# Altium PCB RP2024 DB.PcbDoc
Units mil, origin at the board's own origin, x right, y up, seen from the top; angles counter-clockwise.
Board outline 6000 x 4000 mil, 4 copper layers (Top Layer, Layer 1, Layer 2, Bottom Layer), stack 23.756 mil thick; 43 components, 64 nets, 188 pads, 0 vias.
Unrouted connection lines stored in the file: 112.
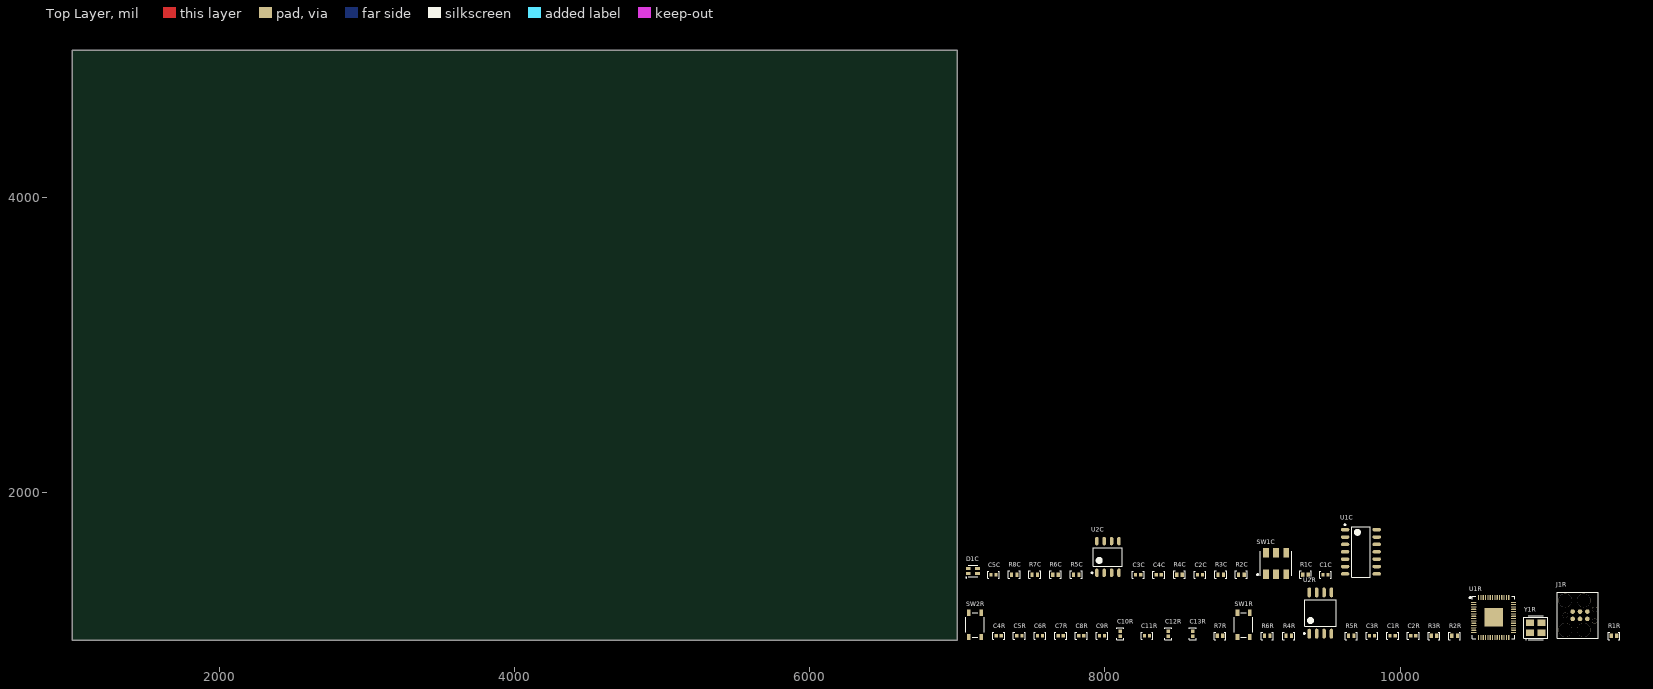
[diagram p0: Top Layer view]
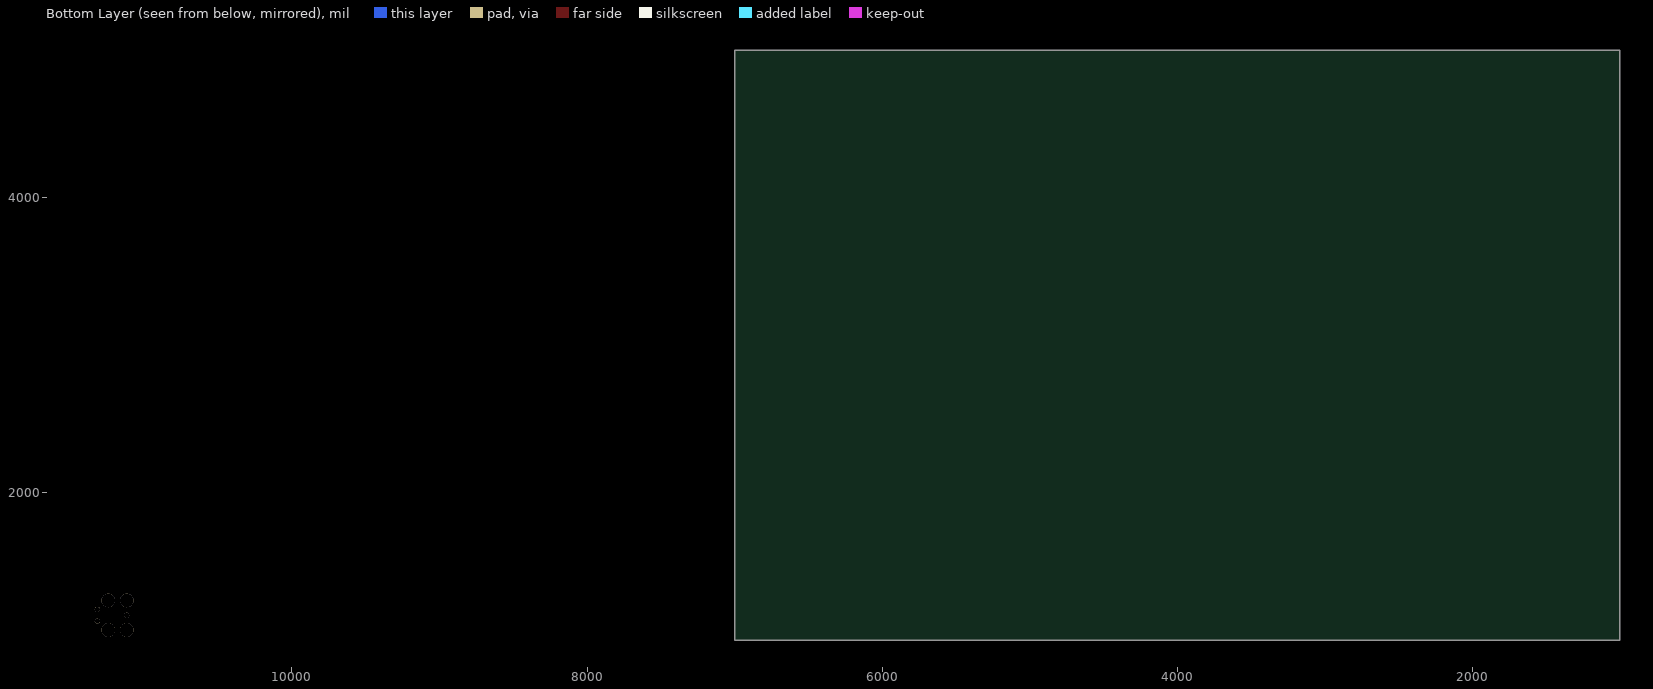
[diagram p1: Bottom Layer view, seen from below]
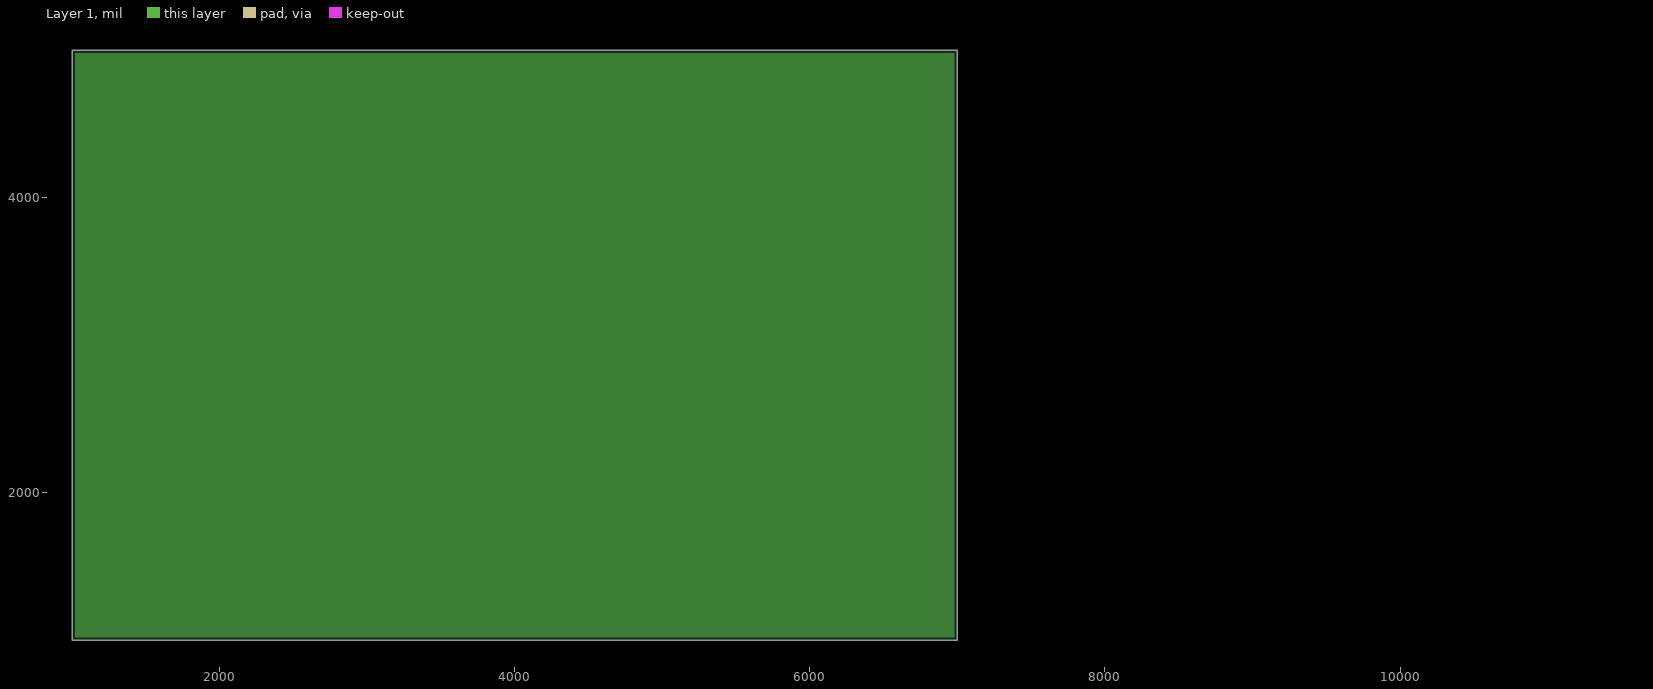
[diagram p2: Layer 1, clearances drawn from the general rule]
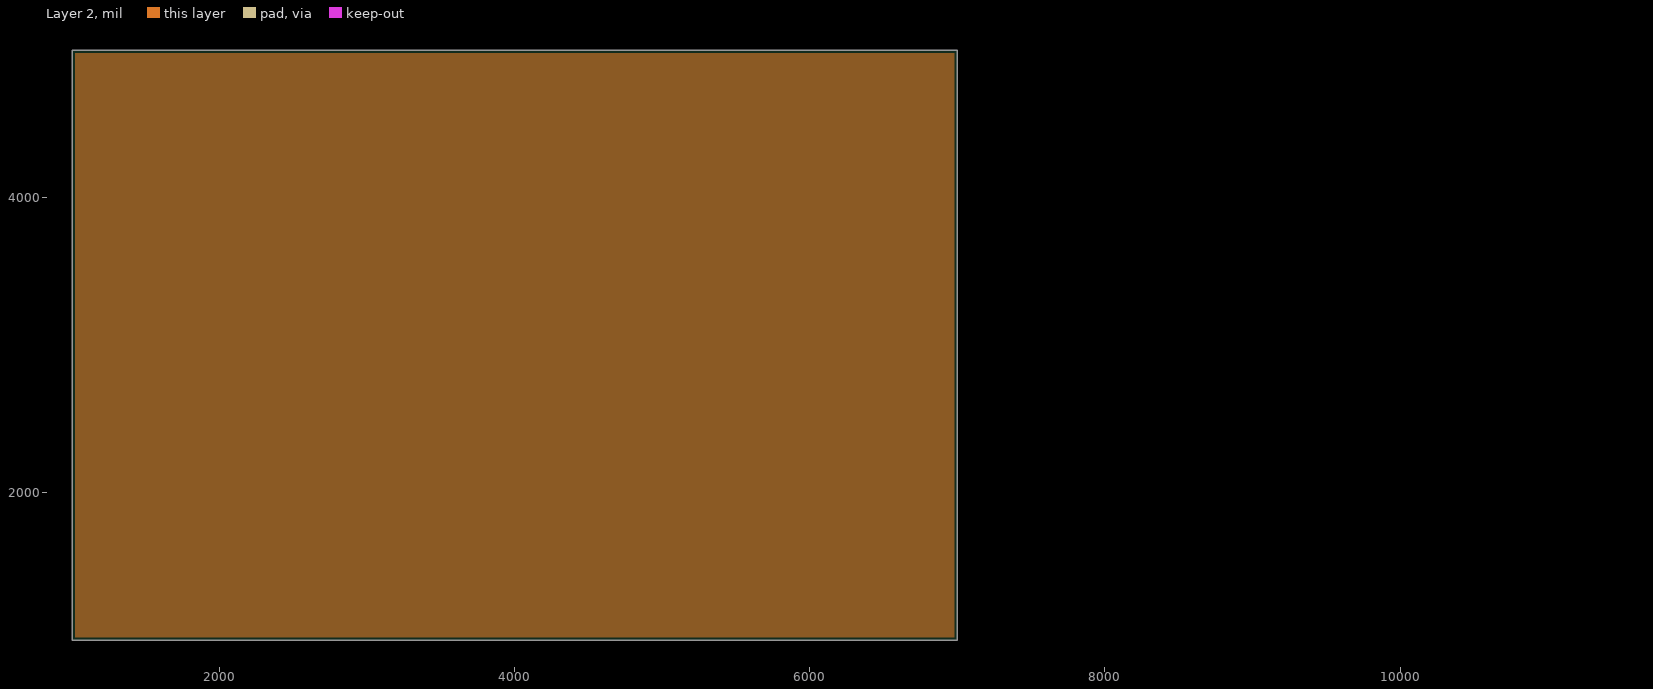
[diagram p3: Layer 2, clearances drawn from the general rule]

## Layer stack, top to bottom
Top Solder: solder mask 0.4, Solder Resist, Dk 3.5
Top Layer: signal copper 1.4
Dielectric 2: prepreg 2.8, PP-006, Dk 4.1
Layer 1: plane copper 1.378
Dielectric 1: dielectric 12.6, FR-4, Dk 4.8
Layer 2: plane copper 1.378
Dielectric 3: prepreg 2.8, PP-006, Dk 4.1
Bottom Layer: signal copper 1.4
Bottom Solder: solder mask 0.4, Solder Resist, Dk 3.5

## Board outline
1000,1000 7000,1000 7000,5000 1000,5000

## Design rules (kind name [scope] priority, off if disabled: settings)
Clearance [All] p1: gap=10 ignorepadtopadclearanceinfootprint=FALSE
DiffPairsRouting [All] p1: maxlimit=10 minlimit=10 mostfreqgap=10 toplayer_minwidth=15 toplayer_maxwidth=15 toplayer_prefwidth=15 bottomlayer_minwidth=15 bottomlayer_maxwidth=15 bottomlayer_prefwidth=15 maxuncoupledlength=500
PlaneClearance [All] p1: clearance=20
PlaneConnect [All] p1: planeconnectstyle=Relief reliefexpansion=20 reliefentries=4 reliefconductorwidth=10 reliefairgap=10
PolygonConnect [All] p1: connectstyle=Relief reliefconductorwidth=10 reliefentries=4 polygonreliefangle="90 Angle" airgapwidth=10
RoomDefinition U_RP2040_with_CAN [InComponentClass('U_RP2040_with_CAN')] p1: confinementstyle=ConfineIn formatcopy=TRUE lockcomponents=FALSE outline 7045,1410 9890,1410 9890,1860 7045,1860
RoomDefinition U_RP2040_C [InComponentClass('U_RP2040_C')] p2: confinementstyle=ConfineIn formatcopy=TRUE lockcomponents=FALSE outline 7045,995 11500,995 11500,1435 7045,1435
RoutingVias [All] p1: holewidth=28 width=50 viastyle="Through Hole" minholewidth=28 minwidth=50 maxholewidth=28 maxwidth=50
SolderMaskExpansion [All] p1: expansion=0 istentingtop=FALSE
Width [All] p1: maxlimit=10 minlimit=10 preferedwidth=10
27 further rules are at their usual default settings.

## Classes and differential pairs
differential pair class "USB 2.0": USB_RP2040
component class U_RP2040_with_CAN: C1C C2C C3C C4C C5C D1C R1C R2C R3C R4C R5C R6C R7C R8C SW1C U1C U2C
component class U_RP2040_C: C1R C2R C3R C4R C5R C6R C7R C8R C9R C10R C11R C12R C13R J1R R1R R2R R3R R4R R5R R6R R7R SW1R SW2R U1R U2R Y1R
differential pair USB_RP2040: +USB_RP2040_P -USB_RP2040_N

## Components (designator, comment, footprint, x,y, rotation, side; value= is the part's Value field where it differs from the comment)
C1C "100nF Ceramic 25V" CAPACITOR_0402 9495,1445 r0 top value=0.1uF
C1R "27pF Ceramic 50V" CAPACITOR_0402 9950,1030 r0 top value=27pF
C2C "4700pF Ceramic 25V" CAPACITOR_0402 8645,1445 r0 top value=4.7nF
C2R "27pF Ceramic 50V" CAPACITOR_0402 10090,1030 r0 top value=27pF
C3C "100nF Ceramic 25V" CAPACITOR_0402 8225,1445 r0 top value=0.1uF
C3R "100nF Ceramic 6.3V" CAPACITOR_0402 9810,1030 r0 top value=0.1uF
C4C "100nF Ceramic 25V" CAPACITOR_0402 8365,1445 r0 top value=0.1uF
C4R "1uF Ceramic 16V" CAPACITOR_0402 7280,1030 r0 top value=1uF
C5C "1uF Ceramic 16V" CAPACITOR_0402 7245,1445 r0 top value=1uF
C5R "100nF Ceramic 6.3V" CAPACITOR_0402 7420,1030 r0 top value=0.1uF
C6R "100nF Ceramic 6.3V" CAPACITOR_0402 7560,1030 r0 top value=0.1uF
C7R "100nF Ceramic 6.3V" CAPACITOR_0402 7700,1030 r0 top value=0.1uF
C8R "100nF Ceramic 6.3V" CAPACITOR_0402 7840,1030 r0 top value=0.1uF
C9R "100nF Ceramic 6.3V" CAPACITOR_0402 7980,1030 r0 top value=0.1uF
C10R "100nF Ceramic 6.3V" CAPACITOR_0402 8105,1045 r90 top value=0.1uF
C11R "1uF Ceramic 16V" CAPACITOR_0402 8285,1030 r0 top value=1uF
C12R "100nF Ceramic 6.3V" CAPACITOR_0402 8430,1045 r90 top value=0.1uF
C13R "100nF Ceramic 6.3V" CAPACITOR_0402 8595,1045 r90 top value=0.1uF
D1C "EAST1616RGBB4" LED_0606_4SMD 7105,1470 r0 top
J1R "TagConnect SWD" TC2030-MCP 11120,1170 r0 top
R1C "10k Ohm 1% 1/16W" RESISTOR_0402 9360,1445 r0 top
R1R "1k Ohm 1% 1/16W" RESISTOR_0402 11450,1030 r0 top
R2C "60.4 Ohm 1% 1/16W" RESISTOR_0402 8925,1445 r0 top
R2R "27 Ohm 1% 1/16W" RESISTOR_0402 10370,1030 r0 top
R3C "60.4 Ohm 1% 1/16W" RESISTOR_0402 8785,1445 r0 top
R3R "27 Ohm 1% 1/16W" RESISTOR_0402 10230,1030 r0 top
R4C "10k Ohm 1% 1/16W" RESISTOR_0402 8505,1445 r0 top
R4R "10k Ohm 1% 1/16W" RESISTOR_0402 9245,1030 r0 top
R5C "604 Ohm 1% 1/16W" RESISTOR_0402 7805,1445 r0 top
R5R "10k Ohm 1% 1/16W" RESISTOR_0402 9670,1030 r0 top
R6C "10k Ohm 1% 1/16W" RESISTOR_0402 7665,1445 r0 top
R6R "1k Ohm 1% 1/16W" RESISTOR_0402 9100,1030 r0 top
R7C "200 Ohm 1% 1/16W" RESISTOR_0402 7525,1445 r0 top
R7R "1k Ohm 1% 1/16W" RESISTOR_0402 8780,1030 r0 top
R8C "200 Ohm 1% 1/16W" RESISTOR_0402 7385,1445 r0 top
SW1C "Switch DPDT" CAS-220TA 9160,1520 r0 top
SW1R "434123025826" SMD_434123025826 8940,1105 r90 top
SW2R "434123025826" SMD_434123025826 7120,1105 r90 top
U1C "MCP2517FD" SOIC-14 9735,1600 r0 top
U1R "RP2040" "QFN-56 RP2040" 10635,1155 r0 top
U2C "CAN Transceiver" SOIC-8 8020,1565 r90 top
U2R "W25Q128JVSIQ" "SOIC-8 W25QxJV" 9460,1185 r90 top
Y1R "CRYSTAL 12.0000MHZ 18PF SMD" "4-SMD, NO LEAD CRYSTAL 3.2x2.5mm" 10880,1050 r0 top

## Footprints (in the part's own frame and the unit in brackets; to place one, negate y for a bottom-side part, rotate by r counter-clockwise, add the part's x,y. Pads: shape width x height; smd on the part's side, far side on the other; paste and mask are expansions set on the pad)
"4-SMD, NO LEAD CRYSTAL 3.2x2.5mm" [mm]
  rrect0% 1.4x1.1 smd: 1(0,0) 2(2.032,0) 3(2.032,1.778) 4(0,1.778)
  silkscreen extent -1.02,-1.2 3.05,2.92, body extent -0.58,-0.36 2.62,2.14, height 0.82
CAPACITOR_0402 [mm]
  rect 0.56x0.6 smd: 1(-0.435,0) 2(0.435,0)
  silkscreen extent -1.02,-0.6 1.02,0.6, body extent -0.5,-0.28 0.5,0.27, height 0.51
CAS-220TA [mm] "SWITCH SLIDE DPDT 100MA 6V"
  rrect0% 1x1.6 smd: 1(-1.75,-1.85) 2(0,-1.85) 3(1.75,-1.85) 4(-1.75,1.85) 5(0,1.85) 6(1.75,1.85)
  silkscreen extent -3.3,-2.1 2.7,2.1, body extent -2.7,-2.1 2.7,2.1, height 2.51
LED_0606_4SMD [mm]
  rrect0% 0.8x0.55 smd: 1(-0.8,-0.45) 2(-0.8,0.45) 3(0.8,0.45) 4(0.8,-0.45)
  silkscreen extent -1.22,-1.22 0.8,1.02, body extent -0.8,-0.8 0.8,0.8, height 0.35
"QFN-56 RP2040" [mm] "QFN, 56-Leads, Body 7.00x7.00mm, Pitch 0.40mm, Thermal Pad 3.10x3.10mm, IPC Medium Density"
  oval 0.875x0.2 smd: 1(-3.437,2.6) 2(-3.437,2.2) 3(-3.437,1.8) 4(-3.437,1.4) 5(-3.437,1) 6(-3.437,0.6) 7(-3.437,0.2) 8(-3.437,-0.2) 9(-3.437,-0.6) 10(-3.437,-1) 11(-3.437,-1.4) 12(-3.437,-1.8) 13(-3.437,-2.2) 14(-3.437,-2.6) 29(3.437,-2.6) 30(3.437,-2.2) 31(3.437,-1.8) 32(3.437,-1.4) 33(3.437,-1) 34(3.437,-0.6) 35(3.437,-0.2) 36(3.437,0.2) 37(3.437,0.6) 38(3.437,1) 39(3.437,1.4) 40(3.437,1.8) 41(3.437,2.2) 42(3.437,2.6)
  oval 0.2x0.875 smd: 15(-2.6,-3.437) 16(-2.2,-3.437) 17(-1.8,-3.437) 18(-1.4,-3.437) 19(-1,-3.437) 20(-0.6,-3.437) 21(-0.2,-3.437) 22(0.2,-3.437) 23(0.6,-3.437) 24(1,-3.437) 25(1.4,-3.437) 26(1.8,-3.437) 27(2.2,-3.437) 28(2.6,-3.437) 43(2.6,3.437) 44(2.2,3.437) 45(1.8,3.437) 46(1.4,3.437) 47(1,3.437) 48(0.6,3.437) 49(0.2,3.437) 50(-0.2,3.437) 51(-0.6,3.437) 52(-1,3.437) 53(-1.4,3.437) 54(-1.8,3.437) 55(-2.2,3.437) 56(-2.6,3.437)
  rect 3.2x3.2 smd: 57(0,0)
  silkscreen extent -4.19,-3.65 3.65,3.65, body extent -3.52,-3.52 3.52,3.52, height 0.85
RESISTOR_0402 [mm] "Resistor 0402"
  rect 0.55x0.75 smd: 1(-0.475,0) 2(0.475,0)
  silkscreen extent -1.02,-0.64 1.02,0.64, body extent -0.5,-0.25 0.5,0.25, height 0.25
SMD_434123025826 [mm]
  rect 1.05x0.65 smd: A1(-2.075,1.075) A2(2.075,1.075) B1(-2.075,-1.075) B2(2.075,-1.075)
  silkscreen extent -2.1,-1.6 2.1,1.6, body extent -2.3,-1.6 2.3,1.6, height 2.5
SOIC-8 [mm] "SOIC, 8-Leads, Body 4.90x3.90mm, Pitch 1.27mm, IPC Medium Density"
  oval 1.45x0.6 smd: 1(-2.725,1.905) 2(-2.725,0.635) 3(-2.725,-0.635) 4(-2.725,-1.905) 5(2.725,-1.905) 6(2.725,-0.635) 7(2.725,0.635) 8(2.725,1.905)
  silkscreen extent -2.85,-2.5 1.6,2.88, body extent -3,-2.5 3,2.5, height 1.75
"SOIC-8 W25QxJV" [mm] "SOIC, 8-Leads, Body 5.28x5.28mm, Pitch 1.27mm, IPC Medium Density"
  oval 1.7x0.6 smd: 1(-3.55,1.905) 2(-3.55,0.635) 3(-3.55,-0.635) 4(-3.55,-1.905) 5(3.55,-1.905) 6(3.55,-0.635) 7(3.55,0.635) 8(3.55,1.905)
  silkscreen extent -3.67,-2.7 2.3,2.88, body extent -3.95,-2.62 3.95,2.62, height 1.95
SOIC-14 [mm] "SOIC, 14-Leads, Body 8.65x3.90mm, Pitch 1.27mm, IPC Medium Density"
  oval 1.45x0.6 smd: 1(-2.725,3.81) 2(-2.725,2.54) 3(-2.725,1.27) 4(-2.725,0) 5(-2.725,-1.27) 6(-2.725,-2.54) 7(-2.725,-3.81) 8(2.725,-3.81) 9(2.725,-2.54) 10(2.725,-1.27) 11(2.725,0) 12(2.725,1.27) 13(2.725,2.54) 14(2.725,3.81)
  silkscreen extent -2.85,-4.35 1.6,4.78, body extent -3,-4.4 3,4.4, height 1.7
TC2030-MCP [mil]
  round 31 smd: 1(50,-25) 2(50,25) 3(100,-25) 4(100,25) 5(150,-25) 6(150,25)
  round 34 hole 35 unplated: A(0,0) B(200,40) C(200,-40)
  round 92 hole 93 unplated: D(0,-100) E(125,-100) F(0,100) G(125,100)
  silkscreen extent -55,-155 225,155

## Part data
C1C C3C C3R C4C C5R C6R C7R C8R C9R C10R C12R C13R: library part CAPACITOR_0.1uF_0402, "Cap 100nF 25V +/-10% / Ceramic 0402", Supplier Part Number 1=478-7868-1-ND, Tolerance="+/- 10%", Voltage=25V, Made By="Robert Pafford", Supplier 1=Digi-Key
C1R C2R: library part CAPACITOR_0.000027uF_0402, "Cap 27pF 50V +/-5% / Ceramic 0402", Supplier Part Number 1=445-5589-1-ND, Tolerance="+/- 5%", Voltage=50V, Made By="Robert Pafford", Supplier 1=Digi-Key
C2C: library part CAPACITOR_0.0047uF_0402, "4700 pF +/-10% 25V Ceramic Capacitor X7R 0402", Supplier Part Number 1=478-6195-1-ND, Tolerance="+/- 10%", Voltage=25V, Made By="Robert Pafford", Supplier 1=Digi-Key
C4R C5C C11R: library part CAPACITOR_1uF_0402, "Cap 1uF 16V +/-10% / Ceramic 0402", Supplier Part Number 1=478-0402YD105KAT4ADKR-ND, Tolerance="+/- 10%", Voltage=16V, Made By="Robert Pafford", Supplier 1=Digi-Key
D1C: library part LED_RGB_4SMD, "LED RGB CLEAR 4SMD", Blue Forward Current=5mA, Blue Forward Voltage=2.8V, Color=RGB, Package=4-SMD, Red Forward Voltage=1.8V, Supplier Part Number 1=1080-1552-1-ND, ComponentLink1Description=Datasheet, ComponentLink1URL=https://everlightamericas.com/index.php?controller=attachment&id_attachment=3220, Green Forward Current=5mA, Green Forward Voltage=2.8V, Made By="Robert Pafford", Red Forward Current=5mA, Supplier 1=Digi-Key
J1R: library part TC2030_SWD, "TagConnect TC2030 ARM SWD 6-pin"
R1C R4C R4R R5R R6C: library part RESISTOR_10K_0402, "RES 10k OHM 1% 1/16W 0402", Digikey Part Numer=CR0603-JW-104ELFTR-ND, Supplier Part Number 1=YAG3436CT-ND, Tolerance="+/- 1%", Value  (Ohms)=10K, Made By="Robert Pafford", Supplier=Digikey, Supplier 1=Digi-Key, Wattage=1/16W
R1R R6R R7R: library part RESISTOR_1K_0402, "RES 1k OHM 1% 1/16W 0402", Digikey Part Numer=CR0603-JW-104ELFTR-ND, Supplier Part Number 1=13-AC0402FR-131KLCT-ND, Tolerance="+/- 1%", Value  (Ohms)=1K, Made By="Robert Pafford", Supplier=Digikey, Supplier 1=Digi-Key, Wattage=1/16W
R2C R3C: library part RESISTOR_60.4_0402, "RES 60.4 OHM 1% 1/16W 0402", Digikey Part Numer=CR0603-JW-104ELFTR-ND, Supplier Part Number 1=13-AC0402FR-0760R4LCT-ND, Tolerance="+/- 1%", Value  (Ohms)=60.4, Made By="Robert Pafford", Supplier=Digikey, Supplier 1=Digi-Key, Wattage=1/16W
R2R R3R: library part RESISTOR_27_0402, "RES 27 OHM 1% 1/16W 0402", Digikey Part Numer=CR0603-JW-104ELFTR-ND, Supplier Part Number 1=YAG5278DKR-ND, Tolerance="+/- 1%", Value  (Ohms)=27, Made By="Robert Pafford", Supplier=Digikey, Supplier 1=Digi-Key, Wattage=1/16W
R5C: library part RESISTOR_604_0402, "RES 604 OHM 1% 1/16W 0402", Digikey Part Numer=CR0603-JW-104ELFTR-ND, Supplier Part Number 1=13-AC0402FR-07604RLCT-ND, Tolerance="+/- 1%", Value  (Ohms)=604, Made By="Robert Pafford", Supplier=Digikey, Supplier 1=Digi-Key, Wattage=1/16W
R7C R8C: library part RESISTOR_200_0402, "RES 200 OHM 1% 1/16W 0402", Digikey Part Numer=CR0603-JW-104ELFTR-ND, Supplier Part Number 1=YAG3453CT-ND, Tolerance="+/- 1%", Value  (Ohms)=200, Made By="Robert Pafford", Supplier=Digikey, Supplier 1=Digi-Key, Wattage=1/16W
SW1C: library part CAS-220TA_CAN_TERM, "GOLD SWITCH FLUSH SLIDE DPDT 100MA 6V", Current Rating="100 mA", Supplier Part Number 1=CAS220JCT-ND, Voltage Rating=6VDC, Contact Finish=Gold, Made By="Robert Pafford", Supplier 1=Digi-Key, Switch Function=DPDT
SW1R SW2R: library part "Tactile Switch SMD", "WS-TASV J-Bend SMT Tact Switch, SPST-NO, 16VDC, 50mA, 260g", Manufacturer="Wurth Elektronik", Operating Temperature Max=85°C, Operating Temperature Min=-40°C, Rated Current=50mA, Rated Voltage=16VDC, Category="Tact Switches", Circuit=SPST-NO, ComponentLink1Description="Website Link", ComponentLink1URL=https://www.we-online.com/redexpert/article/434123025826?ad, ComponentLink2Description="Datasheet Link", ComponentLink2URL=https://www.we-online.com/redexpert/spec/434123025826?ad, Contact Material="Stainless Steel", Contact Plating=Silver, Height=2.5mm, Length=4.2mm, Manufacturer Part Number=434123025826, Match Code=WS-TASV, Mount="Surface Mount", Operation Force=260g, Packaging="Tape and Reel", Terminal Material="Copper Alloy", Terminal Plating=Silver, Washable=No, Width=3.2mm
U1C: "CANbus Controller CAN 2.0 SPI Interface 14-SOIC", Made By="Robert Pafford", Max FD Rate="8 Mbps"
U1R: "Raspberry Pi RP2040", Crystal Frequency="12 MHz", Input Voltage=3.3V, Available Busses="SPI, I2C, PWM, USB", ComponentLink1Description=DigiKey, ComponentLink2Description=Datasheet, ComponentLink2URL=https://datasheets.raspberrypi.org/rp2040/rp2040-datasheet.pdf, Made By="Robert Pafford", Number of GPIOs=29
U2C: library part TJA1442AT, "CAN Interface IC High-Speed CAN Transceiver with Standby Mode", Supplier Part Number 1=771-TJA1442AT/0Z, Made By="Robert Pafford", Max Data Rate=5Mbps, Supplier 1=Mouser
U2R: "IC FLASH 128MBIT SPI/QUAD 8SOIC", Supplier Part Number 1=W25Q128JVSIQ-ND, Made By="Robert Pafford", Size=128M, Supplier 1=Digi-Key
Y1R: library part CRYSTAL_12MHz_SMD_SMALL, "12 MHz ±20ppm Crystal 18pF 100 Ohms 4-SMD, No Lead (3.2x2.5mm)", Frequency="12 MHz", Load Capacitance=18pF, Supplier Part Number 1=2151-RH100-12.000-18-2030-EXT-TRCT-ND, ESR="100 Ohms", Made By="Robert Pafford", Supplier 1=Digi-Key

## Nets (pads, with @x,y where several pads share a name; then routed paths per layer and width w, separated by ;. In a path a pad name is that pad's centre, name@x,y a point inside that pad or via, vN(x,y) a via of type N, cw(c..) or ccw(c..) an arc to the next point about the centre after c; other vN are vias at no path point)
1v1_RP2040: C11R.1 C12R.1 C13R.1 U1R.23 U1R.45 U1R.50
3V3_RP2CAN: C1C.1 C3C.1 C3R.1 C4R.1 C5C.1 C5R.1 C6R.1 C7R.1 C8R.1 C9R.1 C10R.1 D1C.4 J1R.2 R1C.1 R4C.1 R4R.1 R5R.1 U1C.14 U1R.1 U1R.10 U1R.22 U1R.33 U1R.42 U1R.43 U1R.44 U1R.48 U1R.49 U2C.5 U2R.8
CANCLK_RP2CAN: U1C.6 U1R.32
CANH_RP2CAN: SW1C.4 U2C.7
CANL_RP2CAN: SW1C.1 U2C.6
CANRX_RP2CAN: U1C.2 U2C.4
CANTX_RP2CAN: U1C.1 U2C.1
DBG_TX_RP2040: J1R.5 U1R.27
GND_RP2CAN: C1C.2 C1R.2 C2C.1 C2R.2 C3C.2 C3R.2 C4C.2 C4R.2 C5C.2 C5R.2 C6R.2 C7R.2 C8R.2 C9R.2 C10R.2 C11R.2 C12R.2 C13R.2 J1R.6 R6C.2 SW1C.6 SW1R.B1 SW1R.B2 SW2R.B1 SW2R.B2 U1C.7 U1R.19 U1R.57 U2C.2 U2R.4 Y1R.2 Y1R.4
INT_RP2CAN: U1C.4 U1R.34
LEDB_RP2CAN: R8C.1 U1R.18
LEDG_RP2CAN: R7C.1 U1R.17
LEDR_RP2CAN: R5C.1 U1R.16
MISO_RP2CAN: U1C.12 U1R.31
MOSI_RP2CAN: U1C.11 U1R.30
nCS_RP2CAN: R4C.2 U1C.13 U1R.28
NetC2C_2: C2C.2 R2C.2 R3C.2
NetC2R_1: C2R.1 R1R.2 Y1R.3
NetC4C_1: C4C.1 U2C.3
NetD1C_1: D1C.1 R5C.2
NetD1C_2: D1C.2 R7C.2
NetD1C_3: D1C.3 R8C.2
NetR2C_1: R2C.1 SW1C.2
NetR2R_1: R2R.1
NetR3C_1: R3C.1 SW1C.5
NetR3R_1: R3R.1
NetR6C_1: R6C.1 U2C.8
NetR6R_1: R6R.1 SW1R.A2
NetR7R_1: R7R.1 SW2R.A1
NetU1R_2: U1R.2
NetU1R_3: U1R.3
NetU1R_4: U1R.4
NetU1R_5: U1R.5
NetU1R_6: U1R.6
NetU1R_7: U1R.7
NetU1R_8: U1R.8
NetU1R_9: U1R.9
NetU1R_11: U1R.11
NetU1R_12: U1R.12
NetU1R_13: U1R.13
NetU1R_14: U1R.14
NetU1R_15: U1R.15
NetU1R_35: U1R.35
NetU1R_36: U1R.36
NetU1R_37: U1R.37
NetU1R_38: U1R.38
NetU1R_39: U1R.39
NetU1R_40: U1R.40
NetU1R_41: U1R.41
QSPI_SCLK_RP2040: U1R.52 U2R.6
QSPI_SD0_RP2040: U1R.53 U2R.5
QSPI_SD1_RP2040: U1R.55 U2R.2
QSPI_SD2_RP2040: U1R.54 U2R.3
QSPI_SD3_RP2040: U1R.51 U2R.7
QSPI_SS_RP2040: R5R.2 R7R.2 U1R.56 U2R.1
RUN_RP2040: J1R.4 R4R.2 R6R.2 U1R.26
SCK_RP2CAN: U1C.10 U1R.29
SWCLK_RP2040: J1R.3 U1R.24
SWDIO_RP2040: J1R.1 U1R.25
TERM_DET_RP2CAN: R1C.2 SW1C.3 U1C.9
USB_RP2040_N: R3R.2 U1R.46
USB_RP2040_P: R2R.2 U1R.47
XIN_RP2040: C1R.1 U1R.20 Y1R.1
XOUT_RP2040: R1R.1 U1R.21
pads on no net: J1R.A J1R.B J1R.C J1R.D J1R.E J1R.F J1R.G SW1R.A1 SW2R.A2 U1C.3 U1C.5 U1C.8

## Polygon pours and split planes (outlines as drawn)
no net on Layer 1 (split plane): 6979.9,1020.1 1020.1,1020.1 1020.1,4979.9 6979.9,4979.9
no net on Layer 2 (split plane): 6979.9,1020.1 1020.1,1020.1 1020.1,4979.9 6979.9,4979.9